# Altium PCB PCB4.PcbDoc (part 2 of 7)
Units mm, origin at the board's own origin, x right, y up, seen from the top; angles counter-clockwise.
Board outline 234.9 x 198.3 mm, 4 copper layers (Top Layer, Signal Layer 2, Mid, Bottom Layer), stack 3.052 mm thick; 410 components, 320 nets, 2032 pads, 297 vias.
Unrouted connection lines stored in the file: 1.
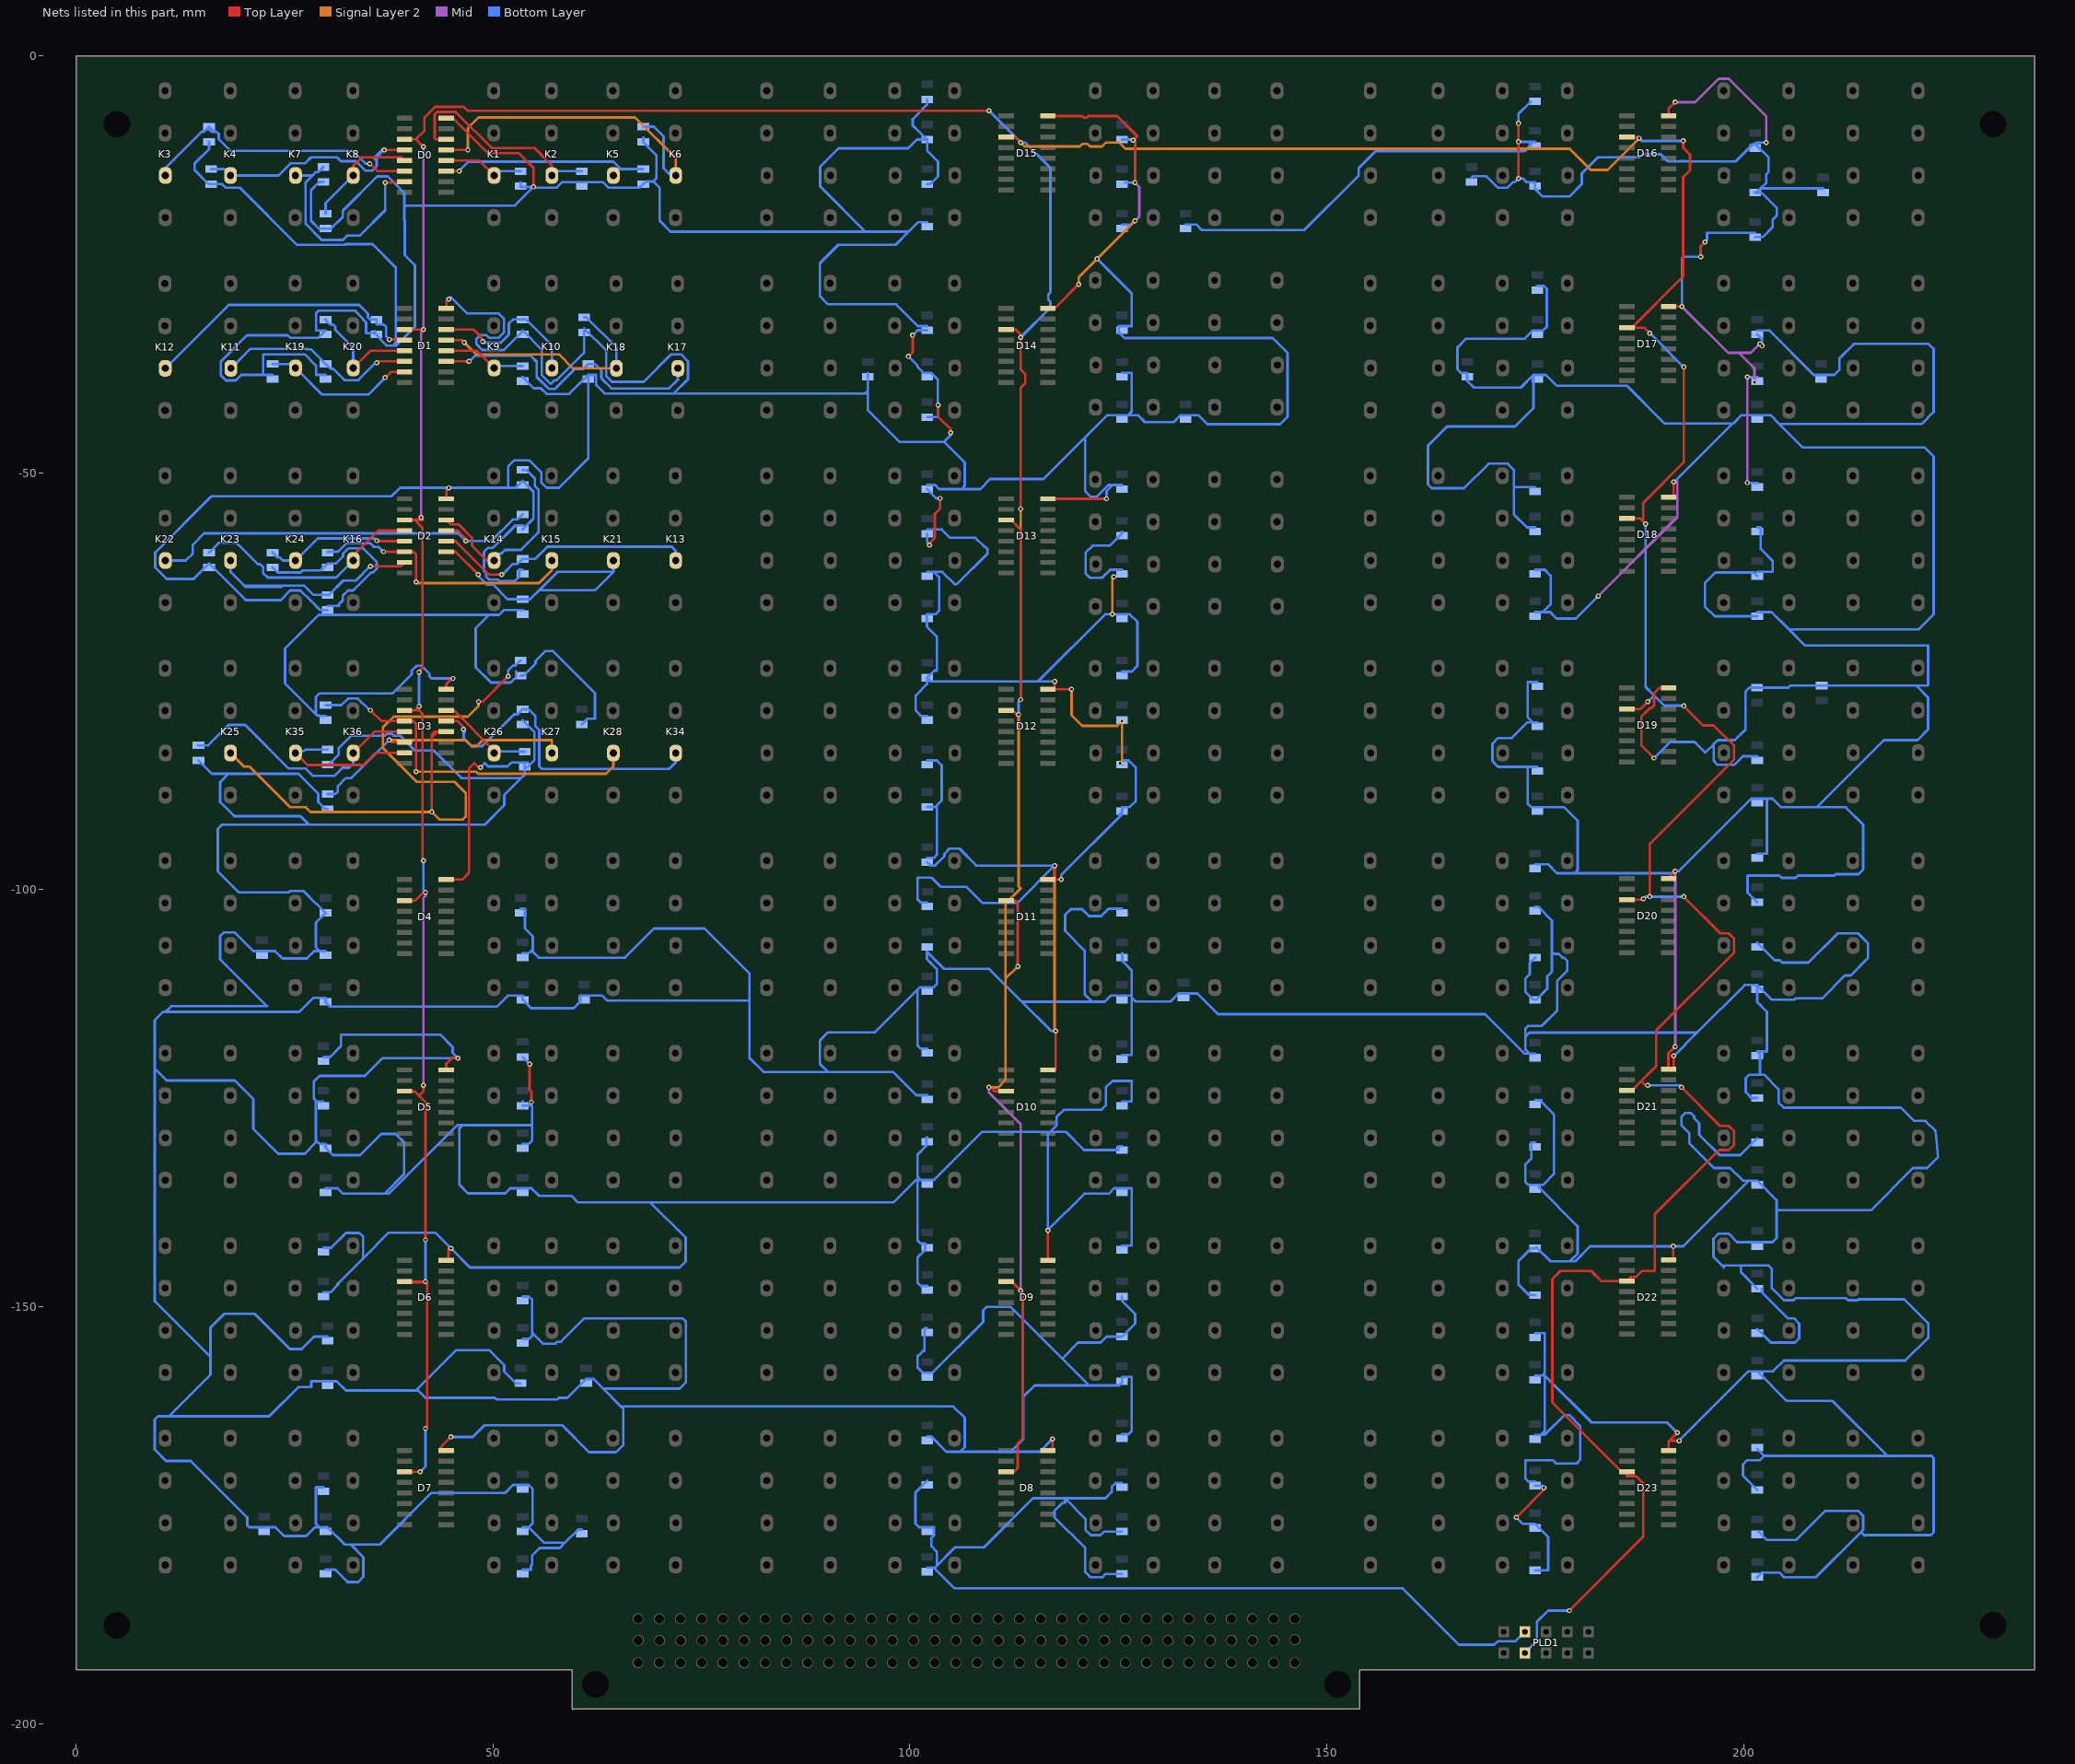
[diagram p4: the nets of this part, all layers, seen from the top]

## Via types
v1: diameter 0.6, hole 0.3, Top Layer to Bottom Layer, 292 vias
v2: diameter 0.7, hole 0.3, Top Layer to Bottom Layer, 5 vias

## Nets (pads, with @x,y where several pads share a name; then routed paths per layer and width w, separated by ;. In a path a pad name is that pad's centre, name@x,y a point inside that pad or via, vN(x,y) a via of type N, cw(c..) or ccw(c..) an arc to the next point about the centre after c; other vN are vias at no path point)
"5V (DIRTY)": D0.16 D1.16 D2.16 D3.16 D4.16 D5.16 D6.16 D7.16 D8.16 D9.16 D10.16 D11.16 D12.16 D13.16 D14.16 D15.16 D16.16 D17.16 D18.16 D19.16 D20.16 D21.16 D22.16 D23.16 PLD1.9 VD1.K VD2.K VD3.K VD4.K VD5.K VD6.K VD7.K VD8.K VD9.K VD10.K VD11.K VD12.K VD13.K VD14.K VD15.K VD16.K VD17.K VD18.K VD19.K VD20.K VD21.K VD22.K VD23.K VD24.K VD25.K VD26.K VD27.K VD28.K VD29.K VD30.K VD31.K VD32.K VD33.K VD34.K VD35.K VD36.K VD37.K VD38.K VD39.K VD40.K VD41.K VD42.K VD43.K VD44.K VD45.K VD46.K VD47.K VD48.K VD49.K VD50.K VD51.K VD52.K VD53.K VD54.K VD55.K VD56.K VD57.K VD58.K VD59.K VD60.K VD61.K VD62.K VD63.K VD64.K VD65.K VD66.K VD67.K VD68.K VD69.K VD70.K VD71.K VD72.K VD73.K VD74.K VD75.K VD76.K VD77.K VD78.K VD79.K VD80.K VD81.K VD82.K VD83.K VD84.K VD85.K VD86.K VD87.K VD88.K VD89.K VD90.K VD91.K VD92.K VD93.K VD94.K VD95.K VD96.K VD97.K VD98.K VD99.K VD100.K VD101.K VD102.K VD103.K VD104.K VD105.K VD106.K VD107.K VD108.K VD109.K VD110.K VD111.K VD112.K VD113.K VD114.K VD115.K VD116.K VD117.K VD118.K VD119.K VD120.K VD121.K VD122.K VD123.K VD124.K VD125.K VD126.K VD127.K VD128.K VD129.K VD130.K VD131.K VD132.K VD133.K VD134.K VD135.K VD136.K VD137.K VD138.K VD139.K VD140.K VD141.K VD142.K VD143.K VD144.K VD145.K VD146.K VD147.K VD148.K VD149.K VD150.K VD151.K VD152.K VD153.K VD154.K VD155.K VD156.K VD157.K VD158.K VD159.K VD160.K VD161.K VD162.K VD163.K VD164.K VD165.K VD166.K VD167.K VD168.K VD169.K VD170.K VD171.K VD172.K VD173.K VD174.K VD175.K VD176.K VD177.K VD178.K VD179.K VD180.K VD181.K VD182.K VD183.K VD184.K VD185.K VD186.K VD187.K VD188.K VD189.K VD190.K VD191.K VD192.K | length 3830.4
  Top Layer w0.3: D7.16@44.407,-167.241 43.787,-167.241 43.787,-166.759 v1(44.956,-165.59) ; D6.16@44.407,-144.418 44.676,-144.418 44.676,-142.984 v1(44.956,-142.984) ; D5.16@44.407,-121.594 44.397,-121.594 44.397,-120.861 45.083,-120.175 v1(45.794,-120.175) ; D4.16@44.407,-98.77 46.327,-98.77 47.115,-97.983 47.115,-85.479 47.775,-84.819 48.283,-85.327 v1(48.512,-85.327) ; D3.16@44.407,-75.947 44.397,-75.947 44.397,-75.344 45.083,-74.658 v1(45.21,-74.658) ; D2.16@44.407,-53.123 44.407,-52.093 v1(44.702,-51.798) ; D1.16@44.407,-30.299 44.407,-29.487 v1(44.702,-29.192) ; D0.16@44.407,-7.475 45.169,-7.475 49.36,-11.666 53.084,-11.666 54.862,-13.444 v1(54.862,-15.73) ; v1(54.402,-120.887) 54.402,-123.983 54.608,-124.189 v1(54.608,-125.459) ; v1(99.82,-36.051) 100.328,-35.543 v1(100.328,-33.511) ; v1(102.36,-58.657) 102.36,-58.403 102.972,-57.79 102.972,-54.916 103.63,-54.259 v1(103.63,-53.069) ; v1(103.376,-41.893) 103.376,-43.271 104.9,-44.795 v1(104.9,-45.195) ; v1(116.533,-140.825) 116.533,-144.418 D9.16@116.543,-144.418 ; D8.16@116.543,-167.241 117.092,-167.241 v1(117.092,-165.844) ; D10.16@116.543,-121.594 117.473,-121.594 v1(117.473,-116.924) ; D11.16@116.543,-98.77 D11.16@117.346,-98.77 ; D12.16@116.543,-75.947 D12.16@117.346,-75.947 ; D13.16@116.543,-53.123 v1(123.569,-53.123) ; D14.16@116.543,-30.299 117.346,-30.299 v1(120.241,-27.404) ; D15.16@116.543,-7.221 120.643,-7.221 120.85,-7.429 121.195,-7.429 121.395,-7.229 124.845,-7.229 127.252,-9.634 v1(126.744,-10.142) ; v1(117.346,-97.087) D11.16@117.346,-98.77 ; v1(117.346,-75.014) D12.16@117.346,-75.947 ; v1(118.133,-98.77) D11.16@117.346,-98.77 ; v1(119.378,-75.947) D12.16@117.346,-75.947 ; v1(126.998,-15.222) v1@126.998,-10.142 ; v1(172.718,-175.243) 176.274,-171.687 v1(176.02,-171.687) ; v1(172.972,-14.714) v1(172.972,-10.319) v1(172.972,-8.11) ; v1(189.228,-84.209) 187.704,-82.685 187.704,-79.256 188.745,-78.214 188.91,-78.214 189.228,-77.897 189.228,-76.436 189.863,-75.801 D19.16@190.966,-75.801 ; D23.16@190.966,-167.241 190.966,-166.215 ; D22.16@190.966,-144.382 191.514,-144.382 v1(191.514,-142.73) ; D20.16@190.966,-98.662 190.966,-98.574 v1(191.768,-97.773) ; D18.16@190.966,-52.942 191.59,-52.942 v1(191.59,-51.111) ; D17.16@190.966,-30.082 v1(192.58,-30.081) ; D16.16@190.966,-7.221 190.966,-6.372 v1(191.768,-5.57) ; v1(191.59,-119.92) 191.59,-121.521 D21.16@190.966,-121.521 190.955,-121.521 190.955,-119.616 v1(191.768,-118.804) ; v1(192.022,-165.082) 190.966,-166.138 190.966,-166.215 ; v1(192.235,-166.048) 191.133,-166.048 190.966,-166.215 ; v1(194.816,-24.113) 194.816,-22.843 v1(195.324,-22.335) ; v1(201.928,-34.527) v1(202.182,-34.781)
  Mid w0.3: v1(126.998,-19.794) 127.494,-19.298 127.494,-15.719 v1(126.998,-15.222) ; v1(182.547,-64.778) 192.022,-55.304 192.022,-51.037 191.947,-51.111 v1(191.59,-51.111) ; v1(191.768,-118.804) v1(191.768,-97.773) v1@191.768,-97.696 ; v1(191.768,-5.57) 194.154,-5.57 196.976,-2.749 198.158,-2.749 202.69,-7.28 v1(202.69,-10.396) ; 192.796,-30.297 198.117,-35.619 199.388,-35.619 ; v1(200.404,-51.189) v1(200.404,-38.513) ; v1(201.267,-39.149) 201.267,-37.498 199.388,-35.619 ; v1(201.928,-34.527) 200.835,-35.619 199.388,-35.619
  Signal Layer 2 w0.3: v1(117.346,-97.087) 117.346,-116.797 v1(117.473,-116.924) ; v1(119.378,-75.947) 119.378,-79.078 120.648,-80.348 124.864,-80.348 v1(125.436,-79.777) 125.436,-84.603 v1(125.22,-84.819) ; v1(120.241,-27.404) 120.241,-26.551 v1(122.451,-24.341) v1(126.998,-19.794) ; v1(124.28,-66.961) 124.28,-62.543 124.356,-62.467 v1(124.458,-62.467)
  Bottom Layer w0.3: VD26.K@14.692,-84.479 16.302,-86.088 18.295,-86.088 ; VD3.K@15.962,-10.311 15.962,-11.197 14.222,-12.937 14.222,-13.699 15.914,-15.391 VD1.K@16.216,-15.391 17.522,-15.391 17.94,-15.808 18.286,-15.808 19.634,-15.808 26.506,-22.681 32.25,-22.681 32.342,-22.588 35.558,-22.588 38.352,-25.382 38.352,-34.399 37.983,-34.769 ; VD18.K@23.582,-61.365 24.181,-61.964 26.918,-61.964 27.177,-61.704 29.346,-61.704 30.185,-60.865 31.217,-60.865 32.036,-60.045 32.036,-59.685 32.657,-59.064 34.441,-59.064 36.054,-60.677 36.054,-61.507 35.614,-61.947 35.402,-61.947 33.23,-64.119 32.617,-64.119 31.996,-64.74 31.996,-65.296 31.348,-65.945 ; 23.581,-38.259 22.35,-38.259 ; 29.677,-171.609 28.776,-171.609 28.776,-176.004 29.206,-176.435 ; 29.678,-148.241 30.53,-148.241 31.43,-147.341 31.341,-147.252 34.44,-144.153 ; 29.678,-142.907 30.606,-142.907 32.383,-141.13 33.97,-141.13 34.44,-141.6 34.44,-144.153 ; 29.677,-125.381 28.89,-125.381 ; 29.678,-120.047 30.478,-120.047 31.773,-118.751 31.773,-117.356 43.66,-117.356 45.159,-118.854 45.159,-119.54 v1(45.794,-120.175) 36.777,-120.175 34.643,-122.309 29.208,-122.309 28.522,-122.995 28.522,-125.012 28.89,-125.381 ; VD4.K@29.678,-15.137 29.177,-15.137 28.192,-16.122 28.192,-19.795 29.122,-20.725 VD2.K@29.932,-20.725 30.594,-20.725 31.996,-19.322 31.996,-18.584 36.108,-14.472 37.392,-14.472 39.368,-16.448 39.368,-18.016 ; 29.931,-181.515 31.085,-181.515 32.56,-182.989 33.83,-182.989 34.465,-182.354 34.465,-180.01 32.949,-178.494 ; 29.932,-135.795 31.367,-135.795 32.003,-136.431 37.005,-136.431 ; 29.931,-112.935 29.919,-112.935 ; 29.931,-107.347 29.208,-107.347 ; 29.932,-79.153 29.208,-79.153 29.088,-79.033 28.969,-79.153 28.656,-78.84 ; 29.932,-38.259 28.782,-38.259 28.782,-37.149 27.43,-35.796 22.431,-35.796 22.431,-38.177 22.35,-38.259 ; 30.185,-153.575 28.547,-153.575 27.072,-155.049 25.652,-155.049 21.435,-150.833 17.778,-150.833 16.127,-152.484 16.127,-156.015 ; VD27.K@30.186,-90.321 29.884,-90.321 29.035,-89.472 29.035,-88.471 26.653,-86.088 18.295,-86.088 ; VD20.K@30.186,-66.445 29.238,-66.445 28.138,-65.344 26.913,-64.119 25.695,-64.119 24.554,-65.26 20.357,-65.26 15.961,-60.865 14.106,-62.72 10.886,-62.72 9.509,-61.343 9.509,-59.559 16.254,-52.814 37.844,-52.814 38.854,-51.804 v1@44.696,-51.804 ; 30.186,-65.945 31.348,-65.945 ; VD28.K@30.478,-84.819 31.494,-83.803 31.494,-83.041 33.018,-81.516 37.03,-81.516 37.246,-81.3 37.868,-81.3 38.084,-81.516 38.86,-81.516 40.638,-83.294 42.924,-83.294 46.226,-86.596 53.383,-86.596 ; 31.542,-65.945 31.348,-65.945 ; VD9.K@35.812,-33.003 VD9.K@35.881,-33.071 ; v1(44.702,-51.798) v1@44.696,-51.804 ; v1(44.956,-165.59) 47.572,-165.59 48.969,-164.193 58.291,-164.193 61.516,-167.419 64.768,-167.419 65.631,-166.556 65.631,-162.211 65.354,-161.933 ; 44.956,-28.939 46.923,-30.906 50.69,-30.906 51.311,-31.527 51.311,-33.186 50.69,-33.806 49.508,-33.806 49.194,-33.493 48.485,-33.493 48.016,-33.962 48.016,-34.583 48.721,-35.288 51.306,-35.288 53.553,-33.041 53.553,-32.925 55.849,-35.22 55.849,-38.266 56.936,-39.352 57.402,-38.886 57.652,-38.886 60.919,-35.619 60.919,-32.671 63.596,-35.347 63.596,-38.434 64.26,-39.098 68.07,-39.098 71.372,-35.796 72.539,-35.796 73.385,-36.643 73.385,-38.792 71.682,-40.495 ; v1(45.21,-74.658) 42.644,-74.658 42.39,-74.405 42.39,-74.08 41.456,-73.146 40.835,-73.146 40.257,-73.725 40.257,-74.151 37.971,-76.436 29.208,-76.436 28.776,-76.868 28.776,-78.721 28.656,-78.84 ; v1(48.512,-85.327) 49.02,-84.818 49.401,-85.199 51.736,-85.199 52.195,-84.741 53.808,-84.741 ; 52.75,-73.819 52.75,-74.529 52.124,-75.155 49.781,-75.155 47.935,-73.308 47.935,-68.617 49.528,-67.024 ; VD55.K@53.3,-159.155 52.744,-159.155 51.351,-157.762 51.351,-157.01 49.518,-155.177 45.591,-155.177 40.739,-160.028 ; 53.299,-102.267 53.846,-102.267 53.846,-104.63 54.785,-105.57 54.785,-107.107 ; VD31.K@53.3,-74.319 53.678,-74.319 55.116,-72.881 55.116,-72.552 56.312,-71.356 57.148,-71.356 62.228,-76.436 62.228,-79.484 61.342,-79.484 VD32.K@60.666,-80.161 ; 53.3,-15.145 53.3,-15.73 v1(54.862,-15.73) ; 53.554,-181.515 54.557,-181.515 54.557,-181.059 54.709,-180.907 54.709,-179.814 55.624,-178.9 58.009,-178.9 58.644,-178.265 ; 53.553,-176.435 54.279,-176.435 ; 53.553,-153.829 54.343,-153.829 54.709,-153.462 54.709,-153.144 ; 53.554,-148.749 54.29,-148.749 54.709,-149.168 54.709,-153.144 ; 53.554,-130.461 54.29,-130.461 54.709,-130.041 54.709,-128.227 ; VD46.K@53.554,-125.881 54.314,-125.881 v1@54.482,-125.713 ; VD45.K@53.554,-120.039 v1(54.402,-120.887) ; 53.554,-112.681 53.541,-112.681 ; 53.553,-107.601 54.292,-107.601 54.785,-107.107 ; 53.553,-79.661 54.958,-81.065 54.958,-84.468 VD29.K@54.1,-85.327 ; 53.553,-66.453 51.302,-66.453 50.73,-67.024 49.528,-67.024 ; 53.554,-61.627 53.109,-61.627 53.109,-62.492 52.638,-62.962 50.741,-62.962 50.591,-62.812 49.533,-62.812 49.182,-62.461 49.182,-62.044 48.918,-61.781 48.918,-59.482 49.388,-59.012 49.983,-59.012 52.703,-56.293 53.553,-56.293 ; VD22.K@53.554,-56.793 54.862,-55.484 54.862,-52.267 53.554,-50.959 52.708,-51.804 51.814,-51.804 ; 53.554,-38.513 54.902,-39.86 55.747,-39.86 56.439,-40.552 59.134,-40.552 61.428,-38.259 ; 54.19,-84.741 53.808,-84.741 ; v1(54.608,-125.459) 54.608,-125.587 v1@54.482,-125.713 ; 60.666,-176.689 60.221,-176.689 58.644,-178.265 ; 68.031,-9.811 68.031,-10.358 69.594,-11.92 69.594,-14.715 69.238,-15.07 ; 94.955,-38.005 94.943,-38.005 94.943,-40.191 ; v1(99.82,-36.051) 100.918,-37.149 100.918,-37.341 101.581,-38.005 102.512,-38.005 103.35,-38.843 v1@103.35,-41.893 ; v1(100.328,-33.511) 100.922,-32.917 VD114.K@102.068,-32.917 ; 100.912,-112.033 100.912,-118.662 101.28,-119.031 102.068,-119.031 ; 102.068,-181.261 102.868,-181.261 ; 102.068,-170.847 100.658,-172.256 100.658,-176.004 101.088,-176.435 102.868,-176.435 102.868,-177.399 102.573,-177.694 102.573,-178.679 103.223,-179.33 103.223,-180.905 ; 102.068,-165.513 102.512,-165.513 104.368,-167.368 106.043,-167.368 ; 102.068,-152.559 101.75,-152.559 101.75,-155.287 101.587,-155.287 100.986,-155.888 100.918,-155.888 100.918,-157.293 101.518,-157.893 102.715,-157.893 108.786,-151.822 108.786,-150.427 109.218,-149.995 112.062,-149.995 118.26,-156.193 ; 102.068,-147.479 101.278,-147.479 100.912,-147.112 100.912,-144.077 101.826,-143.162 101.826,-142.399 101.278,-142.399 100.912,-142.032 100.912,-134.779 ; 102.068,-129.699 101.953,-129.699 101.953,-130.691 100.912,-131.732 100.912,-134.412 101.278,-134.779 ; 102.068,-124.619 100.758,-124.619 97.965,-121.826 90.168,-121.826 ; 102.068,-101.505 101.28,-101.505 100.912,-101.136 100.912,-98.535 102.614,-98.535 103.731,-99.652 106.779,-99.652 108.71,-101.582 112.85,-101.582 v1(117.346,-97.087) 107.963,-97.087 105.935,-95.059 104.753,-95.059 104.132,-95.68 104.132,-95.968 103.013,-97.087 102.484,-97.087 VD89.K@102.068,-96.671 ; 102.068,-96.171 102.868,-96.171 103.223,-95.815 103.223,-89.922 103.199,-89.898 ; VD100.K@102.068,-90.067 103.03,-90.067 103.199,-89.898 ; 102.068,-84.487 103.223,-84.487 103.807,-85.071 103.807,-89.289 103.199,-89.898 ; 102.068,-79.153 101.348,-79.153 100.699,-78.504 100.699,-76.691 102.068,-75.322 VD97.K@102.068,-74.573 ; 102.068,-61.881 102.868,-61.881 ; VD106.K@102.067,-57.301 102.067,-58.364 v1(102.36,-58.657) ; 102.068,-56.801 103.821,-56.801 104.813,-57.793 107.846,-57.793 108.872,-58.818 108.958,-58.818 109.31,-59.17 109.31,-59.667 105.621,-63.355 105.336,-63.355 103.861,-61.881 102.868,-61.881 ; VD105.K@102.068,-51.967 103.17,-53.069 v1(103.63,-53.069) ; 102.068,-51.467 103.018,-51.467 103.503,-51.951 106.17,-51.951 ; VD116.K@102.068,-43.331 103.29,-43.331 103.376,-43.245 v1(103.376,-41.893) ; 102.068,-32.417 100.963,-32.417 98.348,-29.802 90.168,-29.802 89.202,-28.837 89.202,-24.874 91.412,-22.665 98.268,-22.665 99.843,-21.09 ; 102.068,-19.971 100.963,-19.971 99.843,-21.09 ; VD123.K@102.068,-15.391 102.446,-15.391 103.376,-14.461 103.376,-12.683 102.068,-11.375 VD122.K@102.067,-10.057 ; VD121.K@102.068,-5.231 102.068,-5.862 100.328,-7.603 100.328,-8.365 100.582,-8.619 100.629,-8.619 VD122.K@102.067,-10.057 ; v1(104.9,-45.195) 104.9,-45.474 104.087,-46.287 ; v1(117.092,-165.844) 115.568,-167.368 112.088,-167.368 ; v1(117.346,-75.014) 115.363,-75.014 ; v1(117.473,-116.924) 116.939,-116.924 113.434,-113.419 ; v1(118.133,-98.77) 118.133,-98.23 125.448,-90.914 VD104.K@125.289,-90.756 ; v1(122.451,-24.341) 126.591,-28.481 126.591,-32.417 125.042,-32.417 125.042,-33.155 125.728,-33.841 143.508,-33.841 145.286,-35.619 145.286,-43.289 144.397,-44.178 135.661,-44.178 134.567,-43.085 132.486,-43.085 131.646,-43.924 128.191,-43.924 127.351,-43.085 126.161,-43.085 ; v1(123.569,-53.123) 123.569,-52.179 124.282,-51.467 ; VD104.K@125.105,-90.94 VD104.K@125.289,-90.756 ; v1(125.22,-84.819) 125.267,-84.819 VD103.K@125.435,-84.987 ; VD72.K@125.436,-182.015 123.487,-182.015 123.089,-182.413 121.649,-182.413 121.023,-181.787 121.023,-178.92 117.346,-175.243 117.346,-174.436 118.305,-173.476 118.604,-173.476 118.604,-172.968 ; VD71.K@125.436,-176.935 123.284,-176.935 122.866,-177.352 121.684,-177.352 121.063,-176.732 121.063,-175.428 118.604,-172.968 ; 125.435,-171.101 124.663,-171.101 124.204,-171.559 124.204,-172.194 123.442,-172.957 118.616,-172.957 ; 125.435,-165.259 126.225,-165.259 126.591,-164.892 126.591,-158.401 125.423,-158.401 125.423,-159.088 125.093,-159.418 121.486,-159.418 ; VD78.K@125.436,-148.741 125.436,-149.297 126.998,-150.859 126.998,-152.004 VD79.K@125.435,-153.567 123.575,-153.567 122.866,-154.275 120.178,-154.275 118.26,-156.193 ; 125.435,-142.653 126.591,-142.653 126.591,-135.795 124.485,-135.795 123.848,-136.431 120.927,-136.431 v1(116.533,-140.825) 116.533,-129.303 116.822,-129.014 ; 125.435,-130.715 124.991,-130.715 124.991,-131.199 120.876,-131.199 118.692,-129.014 116.822,-129.014 ; 125.435,-125.381 126.591,-125.381 126.591,-122.919 124.28,-122.919 123.492,-123.706 123.492,-125.839 122.975,-126.357 118.479,-126.357 117.584,-127.252 117.584,-128.253 116.822,-129.014 ; 125.435,-119.793 126.591,-119.793 126.591,-112.909 ; 125.435,-107.601 125.448,-107.601 125.448,-108.517 126.591,-109.66 126.591,-112.681 ; 125.435,-102.267 123.824,-102.267 122.934,-103.157 121.46,-103.157 120.622,-102.319 119.301,-102.319 118.616,-103.005 118.616,-104.935 120.952,-107.272 120.952,-112.504 121.867,-113.419 ; 125.435,-90.075 125.448,-90.075 ; 125.435,-84.487 126.236,-84.487 127.099,-85.35 127.099,-89.338 126.363,-90.075 125.448,-90.075 ; v1(125.436,-79.777) VD102.K@125.436,-79.653 ; 125.435,-73.819 126.593,-73.819 127.277,-73.134 127.277,-67.875 126.363,-66.961 v1(124.28,-66.961) 123.416,-66.961 115.363,-75.014 ; 125.435,-61.627 124,-61.627 123.033,-62.593 121.6,-62.593 121.054,-62.047 121.054,-59.596 121.918,-58.733 123.95,-58.733 125.448,-57.234 125.448,-57.055 125.435,-57.055 ; 125.435,-51.467 124.282,-51.467 ; 125.435,-38.005 126.591,-38.005 126.591,-42.654 126.161,-43.085 ; 125.435,-20.225 126.568,-20.225 v1(126.998,-19.794) ; VD125.K@125.435,-10.057 126.658,-10.057 v1(126.744,-10.142) ; VD126.K@125.767,-15.222 v1(126.998,-15.222) ; 133.055,-20.225 134.338,-20.225 135.026,-20.912 147.241,-20.912 153.82,-14.333 153.82,-13.444 155.801,-11.463 173.645,-11.463 174.521,-10.587 VD132.K@174.521,-10.396 ; 166.837,-38.005 166.825,-38.005 ; 167.345,-14.637 167.552,-14.43 169.095,-14.43 170.474,-15.808 171.656,-15.808 172.32,-15.145 172.542,-15.145 v1(172.972,-14.714) 173.48,-14.714 173.91,-15.145 174.966,-15.145 174.966,-15.984 175.855,-16.873 179.068,-16.873 180.566,-15.375 180.566,-14.105 182.497,-12.174 187.475,-12.174 187.831,-11.819 190.04,-11.819 190.904,-12.682 192.323,-12.682 192.361,-12.644 193.023,-12.644 193.061,-12.682 198.979,-12.682 201.089,-10.573 201.351,-10.573 ; v1(172.718,-175.243) 173.49,-176.015 174.966,-176.015 176.528,-177.577 176.528,-181.593 176.526,-181.594 VD188.K@174.965,-181.594 ; v1(172.972,-10.319) 174.966,-10.319 ; v1(172.972,-8.11) 172.972,-6.979 VD131.K@174.438,-5.513 ; PLD1.9@173.734,-188.958 172.616,-190.076 170.495,-190.076 170.076,-190.495 165.821,-190.495 159.078,-183.751 105.359,-183.751 102.868,-181.261 ; VD186.K@174.966,-171.434 175.767,-171.434 v1(176.02,-171.687) ; 174.966,-170.935 174.137,-170.935 173.81,-170.607 173.81,-168.385 177.105,-168.385 177.493,-168.773 179.931,-168.773 180.363,-168.341 180.363,-164.26 179.068,-162.964 178.503,-162.964 176.121,-165.347 175.667,-165.347 ; 174.966,-165.347 175.667,-165.347 ; 174.966,-158.235 175.794,-158.235 ; 174.966,-153.155 176.121,-153.155 176.121,-157.907 175.794,-158.235 ; VD178.K@174.966,-148.574 174.243,-148.574 172.972,-147.303 172.972,-144.509 174.494,-142.986 VD177.K@174.966,-142.986 ; 174.966,-130.295 174.521,-130.295 174.521,-132.189 173.81,-132.901 173.81,-135.047 174.137,-135.375 175.41,-135.375 ; 174.966,-125.215 175.74,-125.215 175.74,-125.433 177.213,-126.906 177.213,-134.094 175.933,-135.375 175.41,-135.375 ; 174.966,-119.627 174.264,-119.627 ; VD163.K@174.966,-108.101 174.316,-108.75 174.316,-110.125 173.816,-110.625 173.816,-111.975 173.815,-112.24 174.756,-113.181 VD164.K@174.965,-113.181 175.09,-113.181 176.423,-111.847 176.423,-110.398 176.985,-109.836 176.985,-107.425 ; 174.966,-102.013 175.307,-102.013 177.036,-103.741 176.985,-103.792 176.985,-107.425 ; 174.966,-96.933 176.528,-96.933 177.596,-98.001 179.703,-98.001 ; 174.966,-66.707 175.893,-66.707 ; 174.966,-61.627 176.119,-61.627 176.832,-62.339 176.832,-65.767 175.893,-66.707 ; 174.966,-56.547 173.988,-56.547 172.413,-54.972 172.413,-51.799 ; 174.966,-51.721 172.491,-51.721 172.413,-51.799 ; VD177.K@175.113,-142.84 176.807,-144.534 179.144,-144.534 ; 175.22,-85.249 174.064,-85.249 ; 175.22,-79.915 174.677,-79.915 ; 175.22,-75.089 174.07,-75.089 174.07,-79.307 174.677,-79.915 ; 175.22,-27.591 176.02,-27.591 176.375,-27.946 176.375,-32.494 175.945,-32.925 174.726,-32.925 173.734,-33.917 166.723,-33.917 165.656,-34.984 165.656,-37.611 166.05,-38.005 166.825,-38.005 ; v1(182.547,-64.778) 179.855,-67.47 177.545,-67.47 176.782,-66.707 175.893,-66.707 ; v1(189.228,-84.209) 191.158,-82.278 194.104,-82.278 195.374,-83.549 196.39,-82.533 ; v1(191.59,-119.92) 194.382,-117.127 ; v1(191.59,-51.111) 198.598,-44.102 ; v1(192.022,-165.082) 190.802,-163.863 181.75,-163.863 176.121,-158.235 ; v1(192.235,-166.048) 200.556,-157.727 201.605,-157.727 ; v1(192.58,-30.081) 192.58,-24.238 192.706,-24.113 v1(194.816,-24.113) ; v1(195.324,-22.335) 195.578,-22.08 195.578,-21.241 201.351,-21.241 ; 197.61,-145.27 197.356,-145.016 ; v1(200.404,-51.189) 200.427,-51.213 201.605,-51.213 ; v1(200.404,-38.513) 201.267,-38.513 ; v1(201.267,-39.149) 201.267,-38.513 ; VD135.K@201.351,-21.741 202.268,-21.741 203.452,-20.557 203.452,-19.64 203.96,-19.132 203.96,-18.271 202.096,-16.407 VD133.K@201.506,-16.407 ; VD133.K@201.351,-16.407 VD133.K@201.506,-16.407 ; VD192.K@201.576,-182.452 202.172,-181.857 204.235,-181.857 204.791,-182.413 208.634,-182.413 214.12,-176.927 ; VD190.K@201.605,-171.942 199.896,-170.233 199.896,-168.893 200.404,-168.385 201.928,-168.385 202.436,-167.876 ; VD189.K@201.605,-167.046 202.436,-167.876 ; 201.605,-152.647 203.233,-154.275 206.138,-154.275 206.629,-153.783 206.629,-151.995 206.008,-151.375 205.269,-151.375 202.155,-148.261 VD182.K@202.155,-147.863 ; VD182.K@201.605,-147.812 199.642,-145.849 199.642,-145.016 ; 201.605,-129.787 199.583,-131.808 197.102,-131.808 194.654,-129.36 194.654,-128.004 194.042,-127.392 194.042,-127.18 193.602,-126.74 192.981,-126.74 192.53,-127.192 192.53,-128.252 193.454,-129.176 193.454,-130.371 196.435,-133.352 198.356,-133.352 199.87,-134.867 200.597,-134.867 ; VD174.K@201.605,-124.952 200.913,-124.952 200.22,-124.259 200.22,-122.594 200.658,-122.156 201.928,-122.156 ; 201.605,-106.331 203.715,-108.441 204.298,-108.441 204.577,-108.719 207.745,-108.719 211.245,-105.219 213.694,-105.219 214.882,-106.406 214.882,-108.187 212.794,-110.274 212.118,-110.274 209.38,-113.013 206.175,-113.013 206.008,-113.179 203.374,-113.179 201.605,-111.411 201.597,-111.411 ; VD166.K@201.605,-101.497 200.454,-100.346 200.454,-98.281 204.258,-98.281 204.537,-98.559 206.217,-98.559 206.496,-98.281 210.843,-98.281 210.995,-98.128 213.751,-98.128 214.297,-97.582 214.297,-92.184 212.215,-90.102 208.735,-90.102 ; 201.605,-95.663 202.766,-95.663 202.766,-89.059 ; 201.605,-83.979 199.87,-83.979 198.827,-85.022 196.848,-85.022 196.39,-84.564 196.39,-82.533 ; VD152.K@201.605,-67.207 196.508,-67.207 195.324,-66.023 195.324,-63.229 196.588,-61.964 198.198,-61.964 198.204,-61.959 201.183,-61.959 VD151.K@201.605,-62.381 ; 201.605,-66.707 203.325,-66.707 205.384,-68.766 ; 201.605,-61.881 203.452,-61.881 203.452,-60.572 202.029,-59.15 202.029,-56.547 201.605,-56.547 ; 201.605,-38.513 201.267,-38.513 ; VD141.K@201.605,-33.425 202.182,-34.001 v1(202.182,-34.781) ; 201.605,-32.925 203.033,-32.925 208.367,-38.259 210.843,-38.259 211.453,-37.649 211.453,-36.304 213.205,-34.552 222.146,-34.552 222.756,-35.161 222.756,-42.705 221.308,-44.153 204.266,-44.153 ; VD191.K@201.761,-176.933 202.781,-177.952 206.257,-177.952 209.757,-174.453 213.694,-174.453 214.315,-175.073 214.315,-176.732 214.12,-176.927 ; v1(202.69,-10.396) 201.527,-10.396 201.351,-10.573 ; 209.51,-15.907 202.006,-15.907 ; 9.446,-121.42 10.894,-122.868 19.048,-122.868 21.257,-125.077 21.257,-128.659 24.229,-131.631 27.43,-131.631 28.776,-130.284 28.776,-130.029 ; 9.446,-121.42 9.446,-149.334 16.127,-156.015 ; 9.446,-121.42 9.446,-115.629 10.437,-114.638 10.742,-114.638 ; 10.742,-114.638 26.767,-114.638 28.471,-112.935 29.919,-112.935 ; 10.742,-114.638 11.428,-113.952 22.908,-113.952 17.295,-108.339 17.295,-105.519 17.701,-105.113 19.048,-105.113 21.281,-107.347 23.872,-107.347 24.763,-108.237 27.682,-108.237 28.573,-107.347 29.208,-107.347 ; 11.148,-163.127 16.127,-158.148 16.127,-156.015 ; 11.148,-163.127 9.827,-163.127 9.446,-163.508 9.446,-167.114 10.793,-168.461 13.764,-168.461 20.546,-175.242 20.546,-176.206 20.775,-176.435 23.923,-176.435 24.966,-177.478 27.606,-177.478 28.649,-176.435 29.206,-176.435 ; 11.148,-163.127 23.161,-163.127 26.666,-159.621 28.217,-159.621 28.217,-158.909 31.263,-158.909 32.383,-160.028 40.739,-160.028 ; 18.295,-86.088 17.279,-87.104 17.279,-89.476 18.972,-91.168 26.922,-91.168 27.938,-92.184 ; 22.35,-38.259 19.835,-38.259 19.171,-38.922 17.988,-38.922 17.368,-38.302 17.368,-36.643 20.5,-33.51 25.4,-33.51 25.695,-33.806 29.05,-33.806 29.932,-32.925 28.782,-32.925 28.782,-30.889 29.11,-30.56 33.453,-30.56 34.42,-31.527 34.42,-31.611 34.796,-31.987 34.796,-33.257 35.767,-33.257 37.279,-34.769 37.983,-34.769 ; 27.938,-92.184 17.524,-92.184 17.016,-92.692 17.016,-97.772 19.556,-100.312 25.522,-100.312 25.695,-100.139 27.254,-100.139 28.782,-101.666 28.809,-101.666 29.92,-102.778 29.932,-102.789 28.776,-103.945 28.776,-106.915 29.208,-107.347 ; 27.938,-92.184 49.02,-92.184 51.351,-89.853 51.351,-88.628 53.383,-86.596 ; 28.656,-78.84 25.075,-75.258 25.075,-71.056 29.106,-67.024 49.528,-67.024 ; 28.776,-130.029 28.776,-125.381 28.89,-125.381 ; 28.776,-130.029 29.208,-130.461 29.931,-130.461 29.931,-130.919 30.82,-131.808 34.076,-131.808 36.616,-129.268 38.326,-129.268 39.342,-130.284 39.342,-134.094 37.005,-136.431 ; 29.206,-176.435 30.173,-176.435 32.232,-178.494 32.949,-178.494 ; 29.919,-112.935 29.919,-113.457 30.465,-114.003 50.466,-114.003 51.788,-112.681 53.541,-112.681 ; 32.949,-178.494 36.421,-178.494 42.593,-172.321 51.433,-172.321 52.4,-171.355 54.29,-171.355 54.735,-171.799 54.735,-175.979 54.279,-176.435 ; 34.44,-144.153 37.488,-141.105 43.076,-141.105 v1(44.956,-142.984) 47.242,-145.27 72.388,-145.27 73.099,-144.559 73.099,-141.714 68.857,-137.473 ; 37.005,-136.431 37.513,-136.431 45.718,-128.227 46.353,-128.227 ; 37.983,-34.769 38.364,-34.769 40.638,-32.494 40.638,-25.128 39.421,-23.911 39.421,-19.794 39.368,-19.794 39.368,-18.016 ; 39.368,-18.016 39.421,-17.964 52.629,-17.964 54.784,-15.808 57.652,-15.808 58.316,-15.145 63.179,-15.145 63.843,-15.808 67.614,-15.808 VD8.K@68.032,-15.391 68.352,-15.07 69.238,-15.07 ; 40.739,-160.028 41.044,-160.028 41.933,-160.917 50.246,-160.917 50.44,-161.111 57.716,-161.111 57.91,-160.917 58.898,-160.917 61.161,-158.655 62.075,-158.655 63.22,-159.799 ; v1@44.696,-51.804 51.814,-51.804 ; 46.353,-128.227 45.972,-128.608 45.972,-135.364 46.988,-136.38 51.482,-136.38 52.068,-135.795 54.631,-135.795 55.522,-136.685 59.408,-136.685 60.196,-137.473 68.857,-137.473 ; 46.353,-128.227 54.709,-128.227 ; 51.814,-51.804 51.814,-49.259 52.576,-48.497 54.354,-48.497 55.809,-49.952 55.809,-51.183 56.429,-51.804 57.904,-51.804 61.428,-48.28 61.428,-38.259 ; 53.383,-86.596 53.808,-86.172 53.808,-84.741 ; 53.541,-112.681 53.541,-113.139 54.582,-114.181 59.688,-114.181 60.475,-113.393 60.475,-112.681 63.091,-112.681 63.703,-113.292 80.744,-113.292 ; 54.279,-176.435 54.29,-176.435 56.121,-178.265 58.644,-178.265 ; v1@54.482,-125.713 54.709,-125.939 54.709,-128.227 ; 54.709,-153.144 55.979,-154.414 57.503,-154.414 57.732,-154.186 58.138,-154.186 60.958,-151.366 72.705,-151.366 73.15,-151.811 73.15,-159.037 72.388,-159.799 63.22,-159.799 ; 54.785,-107.107 54.785,-107.424 55.497,-108.136 65.809,-108.136 69.314,-104.63 75.359,-104.63 80.744,-110.015 80.744,-113.292 ; 61.428,-38.259 62.38,-38.259 62.38,-39.479 63.396,-40.495 71.682,-40.495 ; 63.22,-159.799 65.354,-161.933 ; 65.354,-161.933 105.204,-161.933 106.576,-163.304 106.576,-166.835 106.043,-167.368 ; 68.857,-137.473 98.016,-137.473 100.71,-134.779 100.912,-134.779 ; 69.238,-15.07 70,-15.832 70,-19.794 71.295,-21.09 94.663,-21.09 ; 71.682,-40.495 94.638,-40.495 94.943,-40.191 ; 80.744,-113.292 80.744,-120.124 82.446,-121.826 90.168,-121.826 ; 90.168,-121.826 89.202,-120.861 89.202,-118.042 90.168,-117.076 95.806,-117.076 101.218,-111.665 102.868,-111.665 103.223,-111.309 103.223,-109.482 102.055,-108.313 102.055,-107.424 104.112,-109.482 109.497,-109.482 113.434,-113.419 ; 94.663,-21.09 89.228,-15.654 89.228,-13.317 91.438,-11.108 99.794,-11.108 100.845,-10.057 VD122.K@102.067,-10.057 ; 94.663,-21.09 99.843,-21.09 ; 94.943,-40.191 94.943,-42.477 98.753,-46.287 104.087,-46.287 ; 100.912,-134.779 101.278,-134.779 ; 101.278,-134.779 102.891,-134.779 108.655,-129.014 116.822,-129.014 ; VD97.K@102.068,-74.573 102.923,-73.717 103.223,-73.717 103.223,-69.629 102.055,-68.461 102.055,-66.961 103.098,-66.961 103.503,-66.556 103.503,-62.516 102.868,-61.881 ; VD97.K@102.068,-74.573 102.509,-75.014 115.363,-75.014 ; 102.868,-181.261 102.971,-181.261 105.408,-178.824 108.887,-178.824 114.755,-172.957 118.616,-172.957 ; 104.087,-46.287 106.576,-48.776 106.576,-51.544 106.17,-51.951 ; 106.043,-167.368 112.088,-167.368 ; 106.17,-51.951 108.43,-51.951 109.624,-50.757 115.999,-50.757 121.003,-45.753 ; 112.088,-167.368 113.612,-165.844 113.612,-160.764 114.958,-159.418 121.486,-159.418 ; 113.434,-113.419 121.867,-113.419 ; 118.26,-156.193 121.486,-159.418 ; 118.604,-172.968 118.616,-172.957 ; 121.003,-45.753 121.003,-52.179 121.714,-52.891 122.373,-52.891 123.797,-51.467 124.282,-51.467 ; 121.003,-45.753 123.672,-43.085 126.161,-43.085 ; 121.867,-113.419 123.338,-113.419 124.077,-112.681 126.591,-112.681 ; VD104.K@125.289,-90.756 125.448,-90.597 125.448,-90.075 ; 126.591,-112.909 126.591,-112.681 ; 126.591,-112.909 127.074,-113.392 131.241,-113.392 132.206,-112.427 134.44,-112.427 136.931,-114.917 168.958,-114.917 173.667,-119.627 174.264,-119.627 ; 166.825,-38.005 166.825,-38.971 167.638,-39.784 173.249,-39.784 174.775,-38.259 ; 172.413,-51.799 172.413,-49.639 171.676,-48.903 169.39,-48.903 166.444,-51.849 162.558,-51.849 162.126,-51.417 162.126,-46.744 164.412,-44.458 172.54,-44.458 174.775,-42.223 174.775,-38.259 ; 173.81,-117.584 174.267,-117.127 194.382,-117.127 ; 173.81,-117.584 173.81,-119.172 174.264,-119.627 ; 173.81,-117.584 173.81,-116.632 174.127,-116.314 175.766,-116.314 177.623,-114.457 177.623,-110.895 178.814,-109.704 178.814,-108.517 178.433,-108.136 178.255,-108.136 177.798,-107.678 177.239,-107.678 176.985,-107.425 ; 174.064,-85.249 174.064,-89.644 174.494,-90.075 178.433,-90.075 180.058,-91.7 180.058,-97.645 179.703,-98.001 ; 174.064,-85.249 170.531,-85.249 169.847,-84.564 169.847,-82.482 170.533,-81.796 172.182,-81.796 174.064,-79.915 174.677,-79.915 ; 174.775,-38.259 176.246,-38.259 177.544,-39.556 185.951,-39.556 190.498,-44.102 198.598,-44.102 ; 175.41,-135.375 175.41,-135.695 180.058,-140.343 180.058,-143.619 179.144,-144.534 ; 175.667,-165.347 176.121,-164.892 176.121,-158.235 ; 175.794,-158.235 176.121,-158.235 ; 179.144,-144.534 179.779,-144.534 181.582,-142.73 v1(191.514,-142.73) 192.733,-142.73 200.597,-134.867 ; 179.703,-98.001 191.539,-98.001 v1(191.768,-97.773) 192.172,-97.773 200.886,-89.059 202.766,-89.059 ; 194.382,-117.127 200.099,-111.411 201.597,-111.411 ; 196.39,-82.533 196.39,-82.507 196.848,-82.05 198.905,-82.05 200.2,-80.754 200.2,-76.218 200.658,-75.761 205.331,-75.761 205.585,-75.507 220.657,-75.507 ; 197.356,-145.016 199.642,-145.016 ; 197.356,-145.016 196.355,-144.016 196.355,-141.835 196.976,-141.215 198.158,-141.215 199.176,-142.233 203.442,-142.233 203.933,-141.741 203.933,-138.412 ; 198.598,-44.102 198.702,-44.102 199.72,-43.085 203.198,-43.085 204.266,-44.153 ; 199.642,-145.016 202.944,-145.016 203.355,-145.428 203.355,-147.764 204.786,-149.195 205.968,-149.195 206.225,-148.938 212.215,-148.938 212.472,-149.195 213.654,-149.195 213.769,-149.08 219.21,-149.08 222.125,-151.995 222.125,-153.654 219.349,-156.43 204.786,-156.43 203.489,-157.727 201.605,-157.727 ; 200.597,-134.867 201.605,-134.867 203.933,-137.195 203.933,-138.412 ; 201.351,-10.573 202.944,-12.165 202.944,-13.953 202.69,-14.207 202.69,-15.223 202.006,-15.907 ; VD133.K@201.506,-16.407 202.006,-15.907 ; 201.597,-111.411 201.597,-113.444 202.766,-114.613 202.766,-119.373 201.605,-119.373 201.928,-119.695 201.928,-122.156 ; 201.605,-157.727 205.151,-161.272 210.634,-161.272 217.238,-167.876 ; 201.928,-122.156 202.415,-122.156 204.165,-123.906 204.165,-125.496 204.786,-126.117 218.842,-126.117 220.422,-127.697 221.753,-127.697 223.01,-128.954 223.264,-132.062 221.974,-133.352 220.282,-133.352 215.221,-138.412 203.933,-138.412 ; 202.436,-167.876 217.238,-167.876 ; 202.766,-89.059 203.424,-89.059 204.468,-90.102 208.735,-90.102 ; 204.266,-44.153 207.086,-46.972 221.689,-46.972 222.756,-48.039 222.756,-66.988 220.978,-68.766 205.384,-68.766 ; 205.384,-68.766 207.314,-70.696 222.07,-70.696 222.095,-70.721 222.095,-75.395 221.984,-75.507 220.657,-75.507 ; 208.735,-90.102 216.787,-82.05 220.8,-82.05 222.095,-80.754 222.095,-76.944 220.657,-75.507 ; 214.12,-176.927 214.12,-177.093 214.462,-177.435 214.545,-177.352 222.424,-177.352 222.756,-177.02 222.756,-168.13 222.502,-167.876 217.238,-167.876
CP: D0.3 D1.3 D2.3 D3.3 D4.3 D5.3 D6.3 D7.3 D8.3 D9.3 D10.3 D11.3 D12.3 D13.3 D14.3 D15.3 D16.3 D17.3 D18.3 D19.3 D20.3 D21.3 D22.3 D23.3 PLD1.2 | length 818.6
  Top Layer w0.3: D7.3@39.408,-169.781 v1(41.273,-169.781) ; D4.3@39.408,-101.31 40.656,-101.31 v1@41.654,-100.312 ; D3.3@39.408,-78.487 40.67,-78.487 ; D2.3@39.408,-55.663 40.638,-55.663 ; D1.3@39.408,-32.839 v1(41.654,-32.839) ; D0.3@39.408,-10.015 40.765,-10.015 ; v1(41.146,-78.011) 40.67,-78.487 ; v1(41.146,-73.896) 41.146,-73.769 41.552,-73.363 41.552,-56.577 40.638,-55.663 ; 41.599,-55.663 40.638,-55.663 ; v1(41.654,-123.427) 41.654,-124.189 41.146,-124.696 ; v1(41.654,-96.502) 41.54,-96.389 41.54,-78.881 41.146,-78.487 40.67,-78.487 ; v1(41.654,-10.904) 40.765,-10.015 ; v1(41.908,-164.574) 42.092,-164.39 42.092,-147.142 v1(41.908,-146.958) D6.3@39.408,-146.958 39.498,-147.048 v1@41.908,-147.048 ; v1(41.908,-141.968) 41.908,-125.458 41.146,-124.696 ; v1(109.472,-123.681) 109.682,-123.681 110.135,-124.134 D10.3@111.543,-124.134 ; v1(109.472,-6.586) 46.955,-6.586 46.494,-6.125 43.048,-6.125 41.781,-7.393 41.781,-8.999 40.765,-10.015 ; D8.3@111.543,-169.781 112.481,-169.781 112.926,-169.337 112.926,-166.378 113.536,-165.768 113.536,-148.318 v1(113.282,-148.064) 112.175,-146.958 D9.3@111.543,-146.958 ; D11.3@111.543,-101.31 112.697,-101.31 112.926,-101.539 v1(112.926,-109.202) ; D12.3@111.543,-78.487 112.291,-78.487 v1@113.035,-79.231 ; D13.3@111.543,-55.663 112.142,-55.663 113.282,-56.802 v1(113.282,-77.198) ; D14.3@111.543,-32.839 112.723,-32.839 113.282,-33.398 v1(113.282,-33.764) 113.282,-37.624 113.818,-38.161 113.818,-39.29 113.282,-39.827 v1(113.282,-54.338) ; D15.3@111.543,-9.761 112.647,-9.761 v1(113.282,-10.396) ; v1@113.028,-79.223 v1(113.028,-78.977) ; v1(179.068,-186.418) 187.941,-177.546 187.941,-171.165 187.077,-170.301 185.966,-170.301 D23.3@185.966,-169.781 185.374,-169.781 177.041,-161.448 177.041,-146.649 177.995,-145.695 181.697,-145.695 182.924,-146.922 D22.3@185.966,-146.922 186.486,-146.402 187.077,-146.402 187.792,-145.686 189.32,-145.686 189.32,-138.893 197.016,-131.197 198.198,-131.197 198.819,-130.576 198.819,-128.918 198.198,-128.297 197.146,-128.297 v1(192.53,-123.681) ; D21.3@185.966,-124.061 186.557,-124.061 187.7,-122.919 ; D20.3@185.966,-101.202 187.83,-101.202 v1(187.958,-101.074) ; D19.3@185.966,-78.341 187.577,-78.341 v1(188.466,-77.452) ; D18.3@185.966,-55.482 187.577,-55.482 187.941,-55.846 ; D17.3@185.966,-32.622 D17.3@186.557,-32.622 ; D16.3@185.966,-9.761 187.323,-9.761 v1(187.45,-9.888) ; v1(188.212,-56.116) 187.941,-55.846 ; v1(188.466,-123.427) 188.208,-123.427 187.7,-122.919 ; v1(188.72,-100.82) 188.72,-94.495 198.819,-84.396 198.819,-82.737 196.363,-80.281 195.105,-80.281 v1(192.784,-77.96) ; v1(188.72,-33.256) 188.085,-32.622 D17.3@186.557,-32.622 ; v1(192.721,-10.205) 192.721,-11.052 192.796,-11.126 192.801,-11.126 193.534,-11.858 193.534,-13.734 192.721,-14.547 192.721,-26.457 D17.3@186.557,-32.622 ; v1(192.783,-100.82) 197.182,-105.219 198.198,-105.219 198.819,-105.84 198.819,-107.499 189.482,-116.836 189.482,-121.137 187.7,-122.919 ; v1(192.784,-37.32) 192.784,-48.75 187.941,-53.593 187.941,-55.846 ; D5.3@39.462,-124.188 D5.3@39.408,-124.134 39.462,-124.134 D5.3@39.462,-124.188 ; D5.3@39.462,-124.188 40.583,-124.188 ; 40.583,-124.188 40.583,-124.134 40.638,-124.188 ; 40.583,-124.188 40.638,-124.188 ; 40.638,-124.188 41.146,-124.696
  Mid w0.3: v1(41.4,-55.355) 41.4,-33.093 v1(41.654,-32.839) v1(41.654,-10.904) ; v1(41.654,-123.427) 41.654,-123.268 41.65,-123.265 41.65,-101.004 41.908,-100.747 v1(41.908,-100.312) ; v1(109.472,-123.681) 109.472,-124.29 113.282,-128.1 v1(113.282,-148.064)
  Signal Layer 2 w0.3: v1(109.472,-123.681) 110.589,-123.681 111.453,-122.817 111.453,-110.676 ; v1(112.926,-109.202) 111.453,-110.676 ; v1(113.028,-78.977) 113.028,-99.576 113.282,-99.83 111.453,-101.659 111.453,-110.676 ; v1(113.282,-77.198) v1(113.282,-54.338) ; v1(113.282,-10.396) 113.764,-10.879 120.374,-10.879 120.675,-10.578 121.296,-10.578 121.597,-10.879 123.035,-10.879 123.518,-10.396 125.093,-10.396 125.855,-11.158 179.103,-11.158 181.643,-13.699 183.64,-13.699 v1(187.45,-9.888)
  Bottom Layer w0.3: v1(41.146,-78.011) v1(41.146,-73.896) ; v1(41.273,-169.781) 41.908,-169.146 v1(41.908,-164.574) ; v1(41.654,-96.502) 41.654,-100.058 v1(41.908,-100.312) ; v1@41.908,-147.048 v1(41.908,-146.958) v1(41.908,-141.968) ; v1(109.472,-6.586) v1(113.282,-10.396) 113.802,-10.396 116.85,-13.445 116.85,-28.374 116.596,-28.628 116.596,-29.249 116.85,-29.503 116.85,-30.197 v1(113.282,-33.764) ; v1(113.028,-78.977) 113.028,-77.453 v1(113.282,-77.198) ; PLD1.2@173.734,-191.498 175.174,-190.059 175.174,-187.773 176.528,-186.418 v1(179.068,-186.418) ; v1(187.45,-9.888) 187.766,-10.205 v1(192.721,-10.205) ; v1(187.958,-101.074) 188.212,-100.82 v1(188.72,-100.82) v1(192.783,-100.82) ; v1(188.212,-56.116) 188.212,-75.674 189.228,-76.69 ; v1(188.466,-123.427) 192.276,-123.426 v1(192.53,-123.681) ; v1(188.466,-77.452) 189.228,-76.69 ; v1(188.72,-33.256) v1(192.784,-37.32) ; v1(192.784,-77.96) 192.733,-77.91 190.447,-77.91 189.228,-76.69
  other v1: 192.784,-100.82
D0-0: D0.4 K4.3 VD1.A | length 30.8
  Top Layer w0.3: v1(36.955,-11.285) D0.4@39.408,-11.285
  Bottom Layer w0.3: VD1.A@16.216,-13.591 17.763,-13.59 K4.3@18.531,-14.358 24.285,-14.358 25.735,-12.908 27.458,-12.908 28.192,-12.175 31.286,-12.175 31.748,-12.636 33.567,-12.636 ; v1@37.082,-11.412 v1(36.955,-11.285) ; 33.567,-12.636 34.721,-13.79 ; 33.567,-12.636 34.721,-13.79 ; 34.721,-13.79 35.51,-13.79 36.054,-13.247 36.054,-12.626 ; 36.054,-12.626 35.707,-12.279 36.828,-11.158 v1(36.955,-11.285) ; 36.054,-12.626 36.054,-12.186 v1(36.955,-11.285)
D0-1: D0.5 K8.3 VD2.A | length 13.8
  Top Layer w0.3: K8.3@33.248,-14.358 33.248,-13.214 34.276,-12.186 39.038,-12.186 D0.5@39.408,-12.555
  Bottom Layer w0.3: VD2.A@29.932,-18.925 29.932,-17.675 K8.3@33.248,-14.358
D0-2: D0.6 K3.3 VD3.A | length 35.2
  Top Layer w0.3: v1(35.224,-12.936) 36.113,-13.825 D0.6@39.408,-13.825
  Bottom Layer w0.3: K3.3@10.721,-14.358 10.721,-13.465 15.075,-9.11 15.361,-9.11 VD3.A@15.962,-8.511 ; v1(35.224,-12.936) 34.716,-12.936 33.192,-11.412 18.54,-11.412 17.111,-9.984 17.111,-9.374 16.848,-9.11 16.561,-9.11 ; VD3.A@15.962,-8.511 15.961,-8.834 16.238,-9.11 16.561,-9.11 ; VD3.A@15.962,-8.511 16.561,-9.11
D0-3: D0.7 K7.3 VD4.A | length 27.4
  Top Layer w0.3: v1(37.082,-15.222) 39.281,-15.222 D0.7@39.408,-15.095
  Bottom Layer w0.3: K7.3@26.327,-14.358 28.369,-14.358 ; VD4.A@29.678,-13.337 29.077,-13.936 28.791,-13.936 28.369,-14.358 ; v1(37.082,-15.222) 37.082,-18.524 34.034,-21.572 32.51,-21.572 32.002,-22.081 29.462,-22.081 27.538,-20.157 27.538,-15.189 28.369,-14.358
D0-4: D0.14 K2.3 VD5.A | length 26.5
  Top Layer w0.3: D0.14@44.407,-10.015 43.152,-10.015 43.014,-9.877 43.014,-7.008 43.296,-6.725 45.519,-6.725 45.794,-7 45.794,-7.014 49.846,-11.066 54.973,-11.066 57.061,-13.154 K2.3@57.061,-14.358
  Bottom Layer w0.3: K2.3@57.061,-14.358 57.061,-13.844 VD5.A@60.666,-13.845
D0-5: D0.13 K6.3 VD6.A | length 43.4
  Top Layer w0.3: D0.13@44.407,-11.285 v1(46.988,-11.285)
  Signal Layer 2 w0.3: v1(46.988,-11.285) 46.988,-8.669 48.258,-7.399 67.043,-7.399 71.919,-12.276 K6.3@71.919,-14.358
  Bottom Layer w0.3: VD6.A@68.032,-8.511 69.282,-8.51 70.448,-9.676 70.448,-13.486 71.092,-14.13 71.919,-14.13 K6.3@71.919,-14.358
D0-6: D0.12 K1.3 VD7.A | length 10.2
  Top Layer w0.3: D0.12@44.407,-12.555 48.336,-12.555 K1.3@50.139,-14.358
  Bottom Layer w0.3: K1.3@50.139,-14.358 50.139,-13.825 51.693,-13.825 51.712,-13.844 VD7.A@53.3,-13.845
D0-7: D0.11 K5.3 VD8.A | length 26.1
  Top Layer w0.3: D0.11@44.407,-13.825 v1(45.946,-13.825)
  Bottom Layer w0.3: v1(45.946,-13.825) 47.064,-12.708 64.437,-12.708 65.32,-13.59 ; K5.3@64.435,-14.358 64.435,-13.59 65.32,-13.59 ; VD8.A@68.032,-13.591 65.32,-13.59
D1-0: D1.4 K12.3 VD9.A | length 36.4
  Top Layer w0.3: v1(37.59,-34.018) 39.317,-34.018 D1.4@39.408,-34.109
  Bottom Layer w0.3: K12.3@10.706,-37.472 18.316,-29.862 33.952,-29.862 ; v1(37.59,-34.018) 37.177,-33.606 37.177,-32.488 36.914,-32.224 36.027,-32.224 VD9.A@36.028,-31.625 35.282,-31.624 35.02,-31.362 35.02,-30.93 ; 33.952,-29.862 35.02,-30.93 ; 33.952,-29.862 35.02,-30.93
D1-1: D1.5 K20.3 VD10.A | length 14.4
  Top Layer w0.3: K20.3@33.248,-37.436 35.305,-35.379 D1.5@39.408,-35.379
  Bottom Layer w0.3: VD10.A@29.932,-31.625 29.932,-31.694 30.462,-32.224 30.818,-32.224 31.082,-32.488 31.082,-32.845 33.248,-35.011 K20.3@33.248,-37.436
D1-2: D1.6 K11.3 VD11.A | length 24.3
  Top Layer w0.3: v1(36.066,-36.812) 36.229,-36.649 D1.6@39.408,-36.649
  Bottom Layer w0.3: K11.3@18.58,-37.472 20.918,-35.134 27.616,-35.134 27.678,-35.196 28.17,-35.196 VD11.A@29.932,-36.959 30.532,-37.558 30.863,-37.558 32.19,-38.886 33.839,-38.886 35.913,-36.812 v1(36.066,-36.812)
D1-3: D1.7 K19.3 VD12.A | length 18.5
  Top Layer w0.3: v1(37.082,-38.59) 37.753,-37.919 D1.7@39.408,-37.919
  Bottom Layer w0.3: VD12.A@23.582,-36.959 25.849,-36.958 K19.3@26.327,-37.436 29.513,-40.622 35.05,-40.622 v1(37.082,-38.59)
D1-4: D1.14 K10.3 VD13.A | length 20.1
  Top Layer w0.3: D1.14@44.407,-32.839 47.692,-32.839 48.512,-33.659 48.512,-33.764 48.766,-34.018 v1(48.766,-34.272)
  Bottom Layer w0.3: v1(48.766,-34.272) 48.899,-34.406 50.939,-34.406 51.911,-33.434 51.911,-32.105 ; K10.3@57.061,-37.436 57.061,-34.687 53.998,-31.624 VD13.A@53.554,-31.625 52.391,-31.624 ; 51.911,-32.105 52.391,-31.624 ; 51.911,-32.105 52.391,-31.624
D1-5: D1.13 K18.3 VD14.A | length 29.7
  Top Layer w0.3: D1.13@44.407,-34.109 46.291,-34.109 v1(46.556,-34.374)
  Signal Layer 2 w0.3: v1(46.556,-34.374) 47.978,-35.797 57.91,-35.797 59.585,-37.472 K18.3@64.808,-37.472
  Bottom Layer w0.3: VD14.A@60.92,-31.371 61.206,-31.37 64.808,-34.972 K18.3@64.808,-37.472
D1-6: D1.12 K9.3 VD15.A | length 10.2
  Top Layer w0.3: D1.12@44.407,-35.379 48.082,-35.379 K9.3@50.139,-37.436
  Bottom Layer w0.3: K9.3@50.139,-37.436 50.139,-37.193 53.09,-37.193 53.109,-37.212 VD15.A@53.554,-37.213
D1-7: D1.11 K17.3 VD16.A | length 36.8
  Top Layer w0.3: D1.11@44.407,-36.649 v1(47.151,-36.649)
  Bottom Layer w0.3: v1@46.988,-36.812 v1(47.151,-36.649) 47.814,-35.986 54.543,-35.986 ; K17.3@72.174,-37.472 72.174,-38.844 71.132,-39.886 64.198,-39.886 62.996,-38.683 62.996,-37.726 62.228,-36.958 VD16.A@61.428,-36.959 60.828,-37.558 59.828,-37.558 57.434,-39.952 56.687,-39.952 55.249,-38.514 55.249,-36.692 ; 54.543,-35.986 55.249,-36.692 ; 54.543,-35.986 55.249,-36.692
D2-0: D2.4 K16.3 VD17.A | length 28.8
  Top Layer w0.3: K16.3@33.248,-60.514 33.248,-59.905 36.22,-56.933 D2.4@39.408,-56.933
  Bottom Layer w0.3: VD17.A@15.962,-59.565 17.123,-58.402 19.27,-58.402 21.826,-60.958 22.089,-60.958 22.432,-61.301 22.432,-62.001 22.995,-62.564 31.198,-62.564 K16.3@33.248,-60.514
D2-1: D2.5 K24.3 VD18.A | length 18
  Top Layer w0.3: v1(36.066,-58.148) 36.066,-58.203 D2.5@39.408,-58.203
  Bottom Layer w0.3: VD18.A@23.582,-59.565 24.182,-60.164 24.468,-60.164 ; v1(36.066,-58.148) 35.781,-57.864 28.977,-57.864 K24.3@26.327,-60.514 24.817,-60.514 ; 24.468,-60.164 24.817,-60.514 ; 24.468,-60.164 24.817,-60.514
D2-2: D2.6 K15.3 VD19.A | length 33.1
  Top Layer w0.3: v1(36.882,-59.473) D2.6@39.408,-59.473 40.463,-59.473 40.79,-59.799 v1(40.79,-63.087)
  Signal Layer 2 w0.3: v1(40.79,-63.087) 40.92,-63.217 55.548,-63.217 55.678,-63.087 57.061,-61.704 K15.3@57.061,-60.514
  Bottom Layer w0.3: VD19.A@30.186,-59.565 30.185,-59.464 31.408,-59.464 32.408,-58.464 35.32,-58.464 35.755,-58.899 36.308,-58.899 36.574,-59.164 v1(36.882,-59.473)
D2-3: D2.7 K23.3 VD20.A | length 29.8
  Top Layer w0.3: v1(35.304,-61.196) 38.954,-61.196 D2.7@39.408,-60.743
  Bottom Layer w0.3: K23.3@18.531,-60.514 18.531,-61.899 20.151,-63.519 ; v1(35.304,-61.196) 33.58,-62.92 32.056,-62.92 30.332,-64.644 VD20.A@30.186,-64.645 28.471,-64.644 27.345,-63.519 24.826,-63.519 ; 20.151,-63.519 20.318,-63.686 24.659,-63.686 24.826,-63.519 ; 20.151,-63.519 24.826,-63.519
D2-4: D2.14 K14.3 VD21.A | length 26.8
  Top Layer w0.3: D2.14@44.407,-55.663 44.927,-56.183 45.87,-56.183 47.484,-57.796 47.484,-58.739 49.259,-60.514 K14.3@50.139,-60.514
  Bottom Layer w0.3: K14.3@50.139,-60.514 50.139,-59.664 K14.3@50.482,-59.664 ; VD21.A@53.554,-49.659 VD21.A@53.995,-49.658 ; K14.3@50.482,-59.664 50.508,-59.69 51.005,-59.69 51.031,-59.664 ; K14.3@50.482,-59.664 51.031,-59.664 ; 51.031,-59.664 51.407,-59.288 ; 51.407,-59.288 53.316,-59.288 53.388,-59.215 ; 51.407,-59.288 51.479,-59.215 53.388,-59.215 ; 53.388,-59.215 55.462,-57.142 55.462,-52.018 55.024,-51.58 55.024,-50.687 VD21.A@54.104,-49.767 ; VD21.A@53.995,-49.658 54.104,-49.658 VD21.A@54.104,-49.767 ; VD21.A@53.995,-49.658 VD21.A@54.104,-49.767
D2-5: D2.13 K22.3 VD22.A | length 50.7
  Top Layer w0.3: D2.13@44.407,-56.933 45.772,-56.933 46.734,-57.894 v1(46.734,-58.16)
  Bottom Layer w0.3: K22.3@10.721,-60.514 13.162,-60.514 ; VD22.A@53.554,-54.993 52.953,-55.592 52.403,-55.592 49.835,-58.16 v1(46.734,-58.16) 45.837,-57.264 15.36,-57.264 14.003,-58.621 14.003,-59.673 ; 13.162,-60.514 14.003,-59.673 ; 13.162,-60.514 14.003,-59.673
D2-6: D2.12 K13.3 VD23.A | length 32.2
  Top Layer w0.3: D2.12@44.407,-58.203 45.518,-58.203 49.528,-62.212 v1(51.052,-62.212)
  Bottom Layer w0.3: K13.3@71.92,-60.514 71.92,-59.344 71.435,-58.86 56.532,-58.86 55.065,-60.326 VD23.A@53.554,-60.327 52.954,-60.926 52.404,-60.926 v1@51.239,-62.091 ; v1@51.239,-62.091 51.173,-62.091 v1(51.052,-62.212) 51.118,-62.212 v1@51.239,-62.091
D2-7: D2.11 K21.3 VD24.A | length 35
  Top Layer w0.3: D2.11@44.407,-59.473 45.518,-59.473 v1(48.247,-62.201)
  Bottom Layer w0.3: v1(48.247,-62.201) 48.247,-62.375 49.284,-63.412 50.019,-63.412 51.759,-65.152 VD24.A@53.554,-65.153 54.462,-65.152 55.522,-64.092 ; K21.3@64.435,-60.514 64.435,-61.885 ; 55.522,-64.092 62.228,-64.092 64.435,-61.885 ; 55.522,-64.092 57.729,-61.885 64.435,-61.885
D3-0: D3.4 K28.3 VD25.A | length 43.9
  Top Layer w0.3: v1(35.304,-78.468) 36.592,-79.757 D3.4@39.408,-79.757 40.427,-79.757 40.79,-80.119 v1(40.79,-85.837)
  Signal Layer 2 w0.3: v1(40.79,-85.837) 47.962,-85.837 48.201,-86.077 63.558,-86.077 64.435,-85.199 K28.3@64.435,-83.592
  Bottom Layer w0.3: VD25.A@29.932,-77.853 31.826,-77.852 32.617,-77.062 33.799,-77.062 35.206,-78.468 v1(35.304,-78.468)
D3-1: D3.5 K36.3 VD26.A | length 31.2
  Top Layer w0.3: K36.3@33.248,-83.592 35.813,-81.027 D3.5@39.408,-81.027
  Bottom Layer w0.3: VD26.A@14.692,-82.679 15.855,-82.679 18.307,-80.226 20.292,-80.226 25.522,-85.456 27.559,-85.456 28.446,-86.343 30.986,-86.343 31.951,-85.377 32.753,-85.377 33.248,-84.882 K36.3@33.248,-83.592
D3-2: D3.6 K27.3 VD27.A | length 34
  Top Layer w0.3: v1(37.557,-82.05) 37.804,-82.297 D3.6@39.408,-82.297
  Signal Layer 2 w0.3: v1(37.557,-82.05) 46.714,-82.05 47.439,-82.774 48.06,-82.774 48.785,-82.05 57.061,-82.05 K27.3@57.061,-83.592
  Bottom Layer w0.3: VD27.A@30.186,-88.521 31.086,-88.52 31.396,-88.211 31.396,-87.569 32.368,-86.597 33.01,-86.597 v1(37.557,-82.05)
D3-3: D3.7 K35.3 VD28.A | length 18.5
  Top Layer w0.3: K35.3@26.327,-83.592 27.776,-85.042 34.46,-85.042 35.935,-83.567 D3.7@39.408,-83.567
  Bottom Layer w0.3: K35.3@26.327,-83.592 26.327,-83.345 27.372,-83.345 27.531,-83.186 VD28.A@30.186,-83.187
D3-4: D3.14 K26.3 VD29.A | length 11.9
  Top Layer w0.3: D3.14@44.407,-78.487 45.314,-78.487 50.139,-83.312 K26.3@50.139,-83.592
  Bottom Layer w0.3: K26.3@50.139,-83.592 50.139,-83.421 53.217,-83.421 53.236,-83.44 VD29.A@53.808,-83.441
D3-5: D3.13 K34.3 VD30.A | length 40.2
  Top Layer w0.3: D3.13@44.407,-79.757 45.736,-79.757 46.48,-80.5 v1(46.48,-80.754)
  Bottom Layer w0.3: K34.3@71.92,-83.592 71.92,-84.702 71.118,-85.504 55.878,-85.504 55.558,-85.184 55.558,-80.816 55.065,-80.323 55.065,-79.134 54.291,-78.36 VD30.A@53.554,-78.361 52.953,-78.96 52.54,-78.96 48.726,-82.775 47.439,-82.775 46.492,-81.827 ; 46.492,-81.827 46.492,-81.206 46.642,-81.056 46.642,-80.916 v1(46.48,-80.754) 46.48,-81.815 46.492,-81.827
D3-6: D3.12 K25.3 VD31.A | length 82.6
  Top Layer w0.3: v1(42.67,-90.66) 42.67,-81.745 ; D3.12@45.191,-81.027 D3.12@44.407,-81.027 43.388,-81.027 ; v1(48.258,-77.453) 48.766,-77.453 v1(51.814,-74.404) ; 42.67,-81.745 43.388,-81.027 ; 42.67,-81.745 42.67,-81.389 43.032,-81.027 43.388,-81.027
  Signal Layer 2 w0.3: K25.3@18.531,-83.592 20.166,-85.227 20.826,-85.227 25.7,-90.102 27.552,-90.102 28.111,-90.66 v1(42.67,-90.66) 43.584,-91.575 46.391,-91.575 46.734,-91.232 46.734,-88.374 45.413,-87.054 40.841,-87.054 36.802,-83.015 36.802,-80.526 38.098,-79.23 46.988,-79.23 48.258,-77.961 v1(48.258,-77.453)
  Bottom Layer w0.3: v1(51.814,-74.404) 51.814,-73.718 52.413,-73.119 52.7,-73.119 VD31.A@53.3,-72.519